# Altium PCB Register.PcbDoc
Units mil, origin at the board's own origin, x right, y up, seen from the top; angles counter-clockwise.
Board outline 5200 x 2700 mil, 2 copper layers (Top Layer, Bottom Layer); 55 components, 58 nets, 407 pads, 0 vias.
Unrouted connection lines stored in the file: 199.
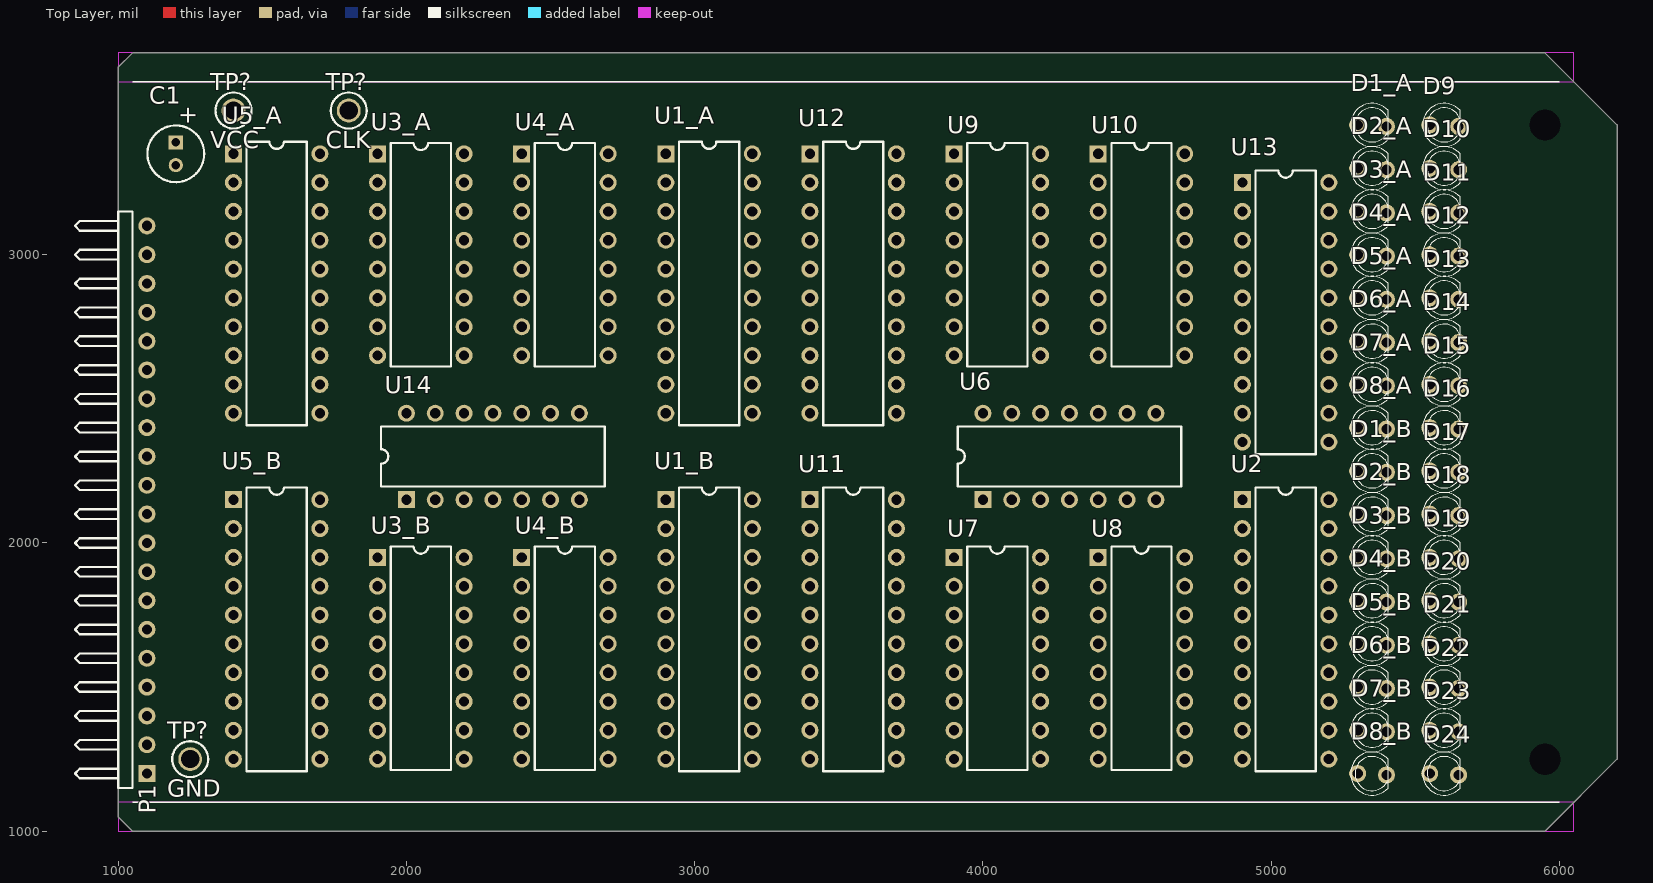
[diagram p0: Top Layer view]
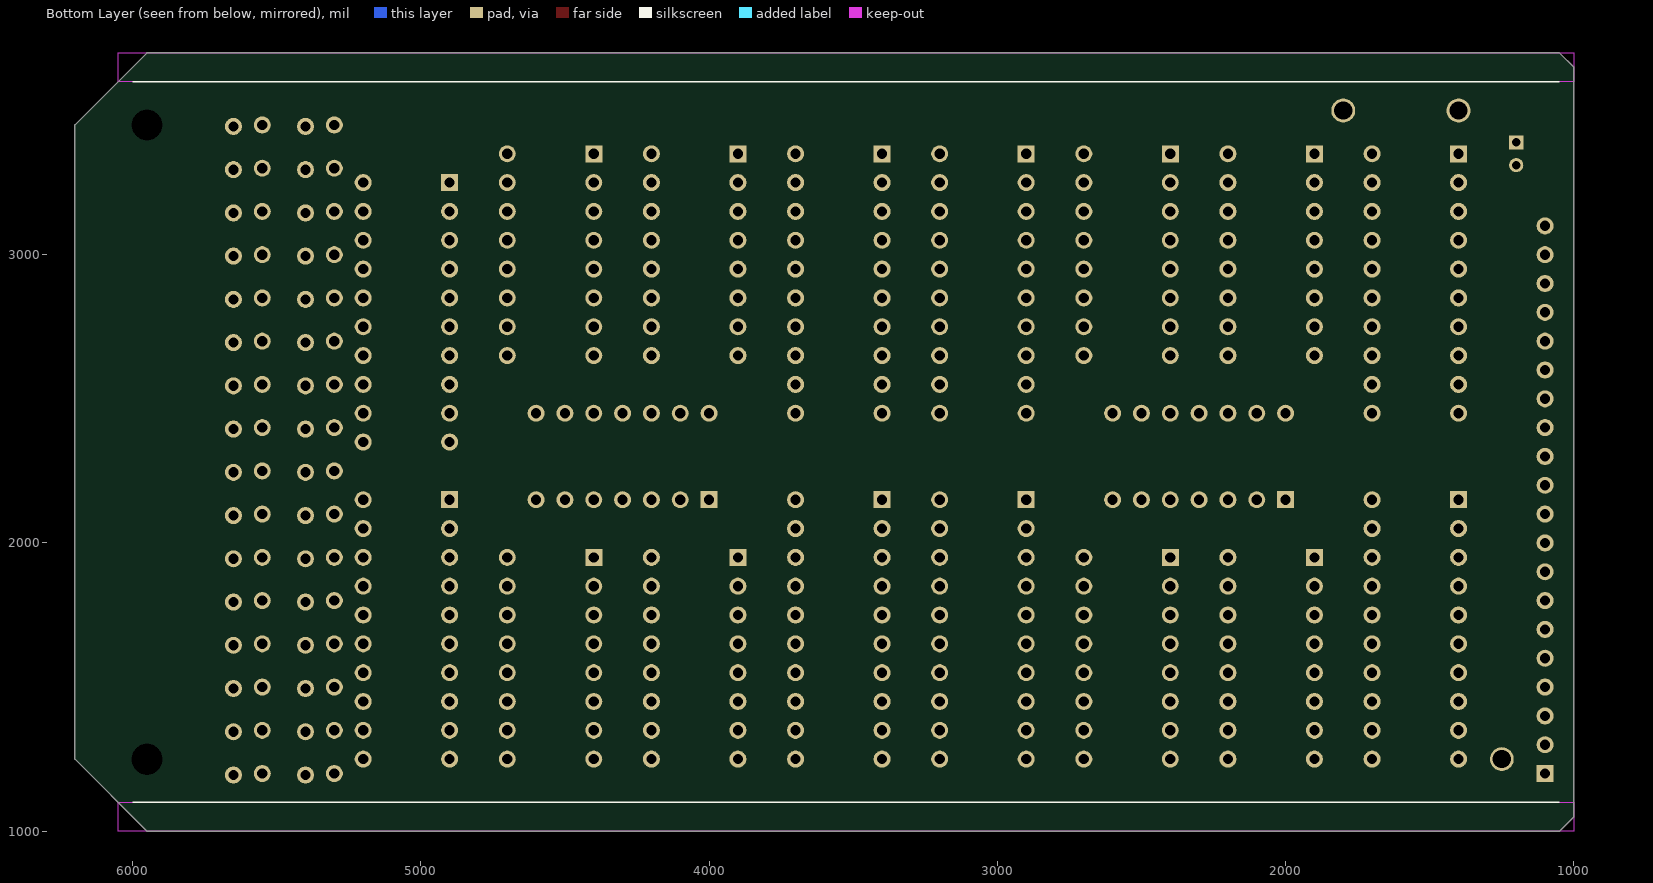
[diagram p1: Bottom Layer view, seen from below]

## Layer stack, top to bottom
Top Solder: solder mask 0.4, Solder Resist, Dk 3.5
Top Layer: signal copper 1.4
Dielectric 1: dielectric 12.6, FR-4, Dk 4.8
Bottom Layer: signal copper 1.4
Bottom Solder: solder mask 0.4, Solder Resist, Dk 3.5

## Board outline
1000,1050 1050,1000 5950,1000 6200,1250 6200,3450 5950,3700 1050,3700 1000,3650

## Design rules (kind name [scope] priority, off if disabled: settings)
Clearance [All] p1: gap=10 ignorepadtopadclearanceinfootprint=FALSE except(0: Arc-Hole Track-Hole SMDPad-Hole THPad-Hole Via-Hole Fill-Hole Poly-Hole Region-Hole Text-Hole)
PolygonConnect [All] p1: connectstyle=Relief reliefconductorwidth=10 reliefentries=4 polygonreliefangle="90 Angle" airgapwidth=10
RoutingVias [All] p1: holewidth=28 width=50 viastyle="Through Hole" minholewidth=28 minwidth=50 maxholewidth=28 maxwidth=50
SolderMaskExpansion [All] p1: expansion=4 istentingtop=FALSE
Width [All] p1: maxlimit=10 minlimit=10 preferedwidth=10
30 further rules are at their usual default settings.

## Classes and differential pairs
net class REG[0..15]: REG0 REG1 REG2 REG3 REG4 REG5 REG6 REG7 REG8 REG9 REG10 REG11 REG12 REG13 REG14 REG15
net class BUS[0..7]: BUS0 BUS1 BUS2 BUS3 BUS4 BUS5 BUS6 BUS7
channel class Register_8B: A B
component class HL: D9 D10 D11 D12 D13 D14 D15 D16 D17 D18 D19 D20 D21 D22 D23 D24 U2 U6 U7 U8 U9 U10 U11 U12 U13
component class B: D1_B D2_B D3_B D4_B D5_B D6_B D7_B D8_B U1_B U3_B U4_B U5_B
component class A: D1_A D2_A D3_A D4_A D5_A D6_A D7_A D8_A U1_A U3_A U4_A U5_A
component class Top: C1 P1 TP? U14

## Components (designator, comment, footprint, x,y, rotation, side; value= is the part's Value field where it differs from the comment)
C1 "Cap Pol5" C5x7 1200,3350 r270 top value=10uF
D1_A "LED Red" "LED 3mm RED" 5350,3450 r0 top (schematic designator D1)
D1_B "LED Red" "LED 3mm RED" 5350,2250 r0 top (schematic designator D1)
D2_A "LED Red" "LED 3mm RED" 5350,3300 r0 top (schematic designator D2)
D2_B "LED Red" "LED 3mm RED" 5350,2100 r0 top (schematic designator D2)
D3_A "LED Red" "LED 3mm RED" 5350,3150 r0 top (schematic designator D3)
D3_B "LED Red" "LED 3mm RED" 5350,1950 r0 top (schematic designator D3)
D4_A "LED Red" "LED 3mm RED" 5350,3000 r0 top (schematic designator D4)
D4_B "LED Red" "LED 3mm RED" 5350,1800 r0 top (schematic designator D4)
D5_A "LED Red" "LED 3mm RED" 5350,2850 r0 top (schematic designator D5)
D5_B "LED Red" "LED 3mm RED" 5350,1650 r0 top (schematic designator D5)
D6_A "LED Red" "LED 3mm RED" 5350,2700 r0 top (schematic designator D6)
D6_B "LED Red" "LED 3mm RED" 5350,1500 r0 top (schematic designator D6)
D7_A "LED Red" "LED 3mm RED" 5350,2550 r0 top (schematic designator D7)
D7_B "LED Red" "LED 3mm RED" 5350,1350 r0 top (schematic designator D7)
D8_A "LED Red" "LED 3mm RED" 5350,2400 r0 top (schematic designator D8)
D8_B "LED Red" "LED 3mm RED" 5350,1200 r0 top (schematic designator D8)
D9 "LED Red" "LED 3mm RED" 5600,3450 r0 top
D10 "LED Red" "LED 3mm RED" 5600,3300 r0 top
D11 "LED Red" "LED 3mm RED" 5600,3150 r0 top
D12 "LED Red" "LED 3mm RED" 5600,3000 r0 top
D13 "LED Red" "LED 3mm RED" 5600,2850 r0 top
D14 "LED Red" "LED 3mm RED" 5600,2700 r0 top
D15 "LED Red" "LED 3mm RED" 5600,2550 r0 top
D16 "LED Red" "LED 3mm RED" 5600,2400 r0 top
D17 "LED Red" "LED 3mm RED" 5600,2250 r0 top
D18 "LED Red" "LED 3mm RED" 5600,2100 r0 top
D19 "LED Red" "LED 3mm RED" 5600,1950 r0 top
D20 "LED Red" "LED 3mm RED" 5600,1800 r0 top
D21 "LED Red" "LED 3mm RED" 5600,1650 r0 top
D22 "LED Red" "LED 3mm RED" 5600,1500 r0 top
D23 "LED Red" "LED 3mm RED" 5600,1350 r0 top
D24 "LED Red" "LED 3mm RED" 5600,1200 r0 top
P1 "Header 20H" HDR1X20H 1100,1200 r90 top
TP? "CLK" KSTN-5011_V 1800,3500 r0 top
TP? "VCC" KSTN-5011_V 1400,3500 r0 top
TP? "GND" KSTN-5011_V 1250,1250 r0 top
U1_A "SN74LS245N" N020 3050,2900 r270 top (schematic designator U1)
U1_B "SN74LS245N" N020 3050,1700 r270 top (schematic designator U1)
U2 "SN74LS245N" N020 5050,1700 r270 top
U3_A "SN74LS173AN" N016D 2050,3000 r270 top (schematic designator U3)
U3_B "SN74LS173AN" N016D 2050,1600 r270 top (schematic designator U3)
U4_A "SN74LS173AN" N016D 2550,3000 r270 top (schematic designator U4)
U4_B "SN74LS173AN" N016D 2550,1600 r270 top (schematic designator U4)
U5_A "SN74LS245N" N020 1550,2900 r270 top (schematic designator U5)
U5_B "SN74LS245N" N020 1550,1700 r270 top (schematic designator U5)
U6 "SN74LS00N" N014 4300,2300 r0 top
U7 "SN74LS173AN" N016D 4050,1600 r270 top
U8 "SN74LS173AN" N016D 4550,1600 r270 top
U9 "SN74LS173AN" N016D 4050,3000 r270 top
U10 "SN74LS173AN" N016D 4550,3000 r270 top
U11 "SN74LS245N" N020 3550,1700 r270 top
U12 "SN74LS245N" N020 3550,2900 r270 top
U13 "SN74LS245N" N020 5050,2800 r270 top
U14 "SN74LS04N" N014 2300,2300 r0 top

## Footprints (in the part's own frame and the unit in brackets; to place one, negate y for a bottom-side part, rotate by r counter-clockwise, add the part's x,y. Pads: shape width x height; smd on the part's side, far side on the other; paste and mask are expansions set on the pad)
C5x7 [mm] "Capacitor; 2 Leads"
  rect 1.25x1.25 hole 0.75: 1(-1,0)
  round 1.25 hole 0.75: 2(1,0)
  silkscreen extent -2.5,-2.5 2.5,2.5, body extent -2.5,-2.5 2.5,2.5, height 7
HDR1X20H [mm] "Connector; Header; 20 Position; Right Angle"
  rect 1.5x1.5 hole 0.9: 1(0,0)
  round 1.5 hole 0.9: 2(2.54,0) 3(5.08,0) 4(7.62,0) 5(10.16,0) 6(12.7,0) 7(15.24,0) 8(17.78,0) 9(20.32,0) 10(22.86,0) 11(25.4,0) 12(27.94,0) 13(30.48,0) 14(33.02,0) 15(35.56,0) 16(38.1,0) 17(40.64,0) 18(43.18,0) 19(45.72,0) 20(48.26,0)
  silkscreen extent -1.27,1.27 49.53,6.35
KSTN-5011_V [mm] "Test Point, Dia 3.17mm"
  round 2.1 hole 1.6: 1(0,0)
  silkscreen extent -1.59,-1.58 1.59,1.58, body extent -1.59,-1.59 1.59,1.59, height 8.13
"LED 3mm RED" [mm]
  round 1.5 hole 0.9: 1(-1.27,0) 2(1.27,-0.127)
  silkscreen extent -1.9,-1.9 1.41,1.9, body extent -1.92,-1.92 1.65,1.92, height 5.3
N014 [mm] "DIP; 14 Leads; Row Spacing 7.62 mm; Pitch 2.54 mm"
  rect 1.5x1.5 hole 0.9: 1(-7.62,-3.81)
  round 1.5 hole 0.9: 2(-5.08,-3.81) 3(-2.54,-3.81) 4(0,-3.81) 5(2.54,-3.81) 6(5.08,-3.81) 7(7.62,-3.81) 8(7.62,3.81) 9(5.08,3.81) 10(2.54,3.81) 11(0,3.81) 12(-2.54,3.81) 13(-5.08,3.81) 14(-7.62,3.81)
  silkscreen extent -9.85,-2.65 9.85,2.65, body extent -9.15,-5.08 9.15,5.12, height 7.88
N016D [mm] "DIP; 16 Leads; Row Spacing 7.62 mm; Pitch 2.54 mm"
  rect 1.5x1.5 hole 0.9: 1(-8.89,-3.81)
  round 1.5 hole 0.9: 2(-6.35,-3.81) 3(-3.81,-3.81) 4(-1.27,-3.81) 5(1.27,-3.81) 6(3.81,-3.81) 7(6.35,-3.81) 8(8.89,-3.81) 9(8.89,3.81) 10(6.35,3.81) 11(3.81,3.81) 12(1.27,3.81) 13(-1.27,3.81) 14(-3.81,3.81) 15(-6.35,3.81) 16(-8.89,3.81)
  silkscreen extent -9.85,-2.65 9.85,2.65
N020 [mm] "DIP; 20 Leads; Row Spacing 7.62 mm; Pitch 2.54 mm"
  rect 1.5x1.5 hole 0.9: 1(-11.43,-3.81)
  round 1.5 hole 0.9: 2(-8.89,-3.81) 3(-6.35,-3.81) 4(-3.81,-3.81) 5(-1.27,-3.81) 6(1.27,-3.81) 7(3.81,-3.81) 8(6.35,-3.81) 9(8.89,-3.81) 10(11.43,-3.81) 11(11.43,3.81) 12(8.89,3.81) 13(6.35,3.81) 14(3.81,3.81) 15(1.27,3.81) 16(-1.27,3.81) 17(-3.81,3.81) 18(-6.35,3.81) 19(-8.89,3.81) 20(-11.43,3.81)
  silkscreen extent -12.5,-2.65 12.5,2.65, body extent -13.08,-5.08 13.08,5.12, height 7.88

## Part data
C1: "Polarized Capacitor", LatestRevisionDate=17-Jul-2002, LatestRevisionNote="Re-released for DXP Platform.", PackageDescription="Polarized Capacitor; 2 Leads", PackageReference=POLAR0.8, Published=8-Jun-2000, Publisher="Altium Limited"
D1_A D1_B D2_A D2_B D3_A D3_B D4_A D4_B D5_A D5_B D6_A D6_B D7_A D7_B D8_A D8_B D9 D10 D11 D12 D13 D14 D15 D16 D17 D18 D19 D20 D21 D22 D23 D24: library part LED_Red
P1: "Header, 20-Pin, Right Angle", LatestRevisionDate=17-Jul-2002, LatestRevisionNote="Re-released for DXP Platform.", Publisher="Altium Limited", System=Connector
TP? TP? TP?: library part TP
U1_A U1_B U2 U5_A U5_B U11 U12 U13: "Octal Bus Transceiver with 3-State Outputs", ComponentLink1Description="Manufacturer Link", ComponentLink1URL=http://www.ti.com/, ComponentLink2Description=Datasheet, ComponentLink2URL=http://www-s.ti.com/sc/ds/sn74ls245.pdf, DatasheetVersion=Mar-1988, LatestRevisionDate=04-Mar-2005, LatestRevisionNote="Stylized 3D Model Added.", PackageDescription="DIP; 20 Leads; Row Spacing 7.62 mm; Pitch 2.54 mm", PackageReference=N020, PackageVersion=Oct-1995, Published=8-Jun-2000, Publisher="Altium Limited"
U3_A U3_B U4_A U4_B U7 U8 U9 U10: "4-Bit D-Type Register with 3-State Outputs", Code_JEDEC=MS-001-BB, ComponentLink1Description="Manufacturer Link", ComponentLink1URL=http://www.ti.com/, ComponentLink2Description=Datasheet, ComponentLink2URL=http://www-s.ti.com/sc/ds/sn74ls173a.pdf, DatasheetVersion=Mar-1988, LatestRevisionDate=04-Mar-2005, LatestRevisionNote="Stylized 3D Model Added.", PackageDescription="DIP; 16 Leads; Row Spacing 7.62 mm; Pitch 2.54 mm", PackageReference=N016D, PackageVersion=Oct-1995, Published=8-Jun-2000, Publisher="Altium Limited"
U6: "Quadruple 2-Input Positive-NAND Gate", ComponentLink1Description="Manufacturer Link", ComponentLink1URL=http://www.ti.com/, ComponentLink2Description=Datasheet, ComponentLink2URL=http://www-s.ti.com/sc/ds/sn74ls00.pdf, DatasheetVersion=Mar-1988, LatestRevisionDate=04-Mar-2005, LatestRevisionNote="Stylized 3D Model Added.", PackageDescription="DIP; 14 Leads; Row Spacing 7.62 mm; Pitch 2.54 mm", PackageReference=N014, PackageVersion=Oct-1995, Published=8-Jun-2000, Publisher="Altium Limited"
U14: "Hex Inverter", ComponentLink1Description="Manufacturer Link", ComponentLink1URL=http://www.ti.com/, ComponentLink2Description=Datasheet, ComponentLink2URL=http://www-s.ti.com/sc/ds/sn74ls04.pdf, DatasheetVersion=Mar-1988, LatestRevisionDate=04-Mar-2005, LatestRevisionNote="Stylized 3D Model Added.", PackageDescription="DIP; 14 Leads; Row Spacing 7.62 mm; Pitch 2.54 mm", PackageReference=N014, PackageVersion=Oct-1995, Published=8-Jun-2000, Publisher="Altium Limited"

## Free pads (board coordinates)
  round 0 hole 109: ""(5950,1250) ""(5950,3450)

## Nets (pads, with @x,y where several pads share a name; then routed paths per layer and width w, separated by ;. In a path a pad name is that pad's centre, name@x,y a point inside that pad or via, vN(x,y) a via of type N, cw(c..) or ccw(c..) an arc to the next point about the centre after c; other vN are vias at no path point)
AI#: P1.14 U3_A.9 U3_A.10 U4_A.9 U4_A.10
AO#: P1.17 U5_A.19
BI#: P1.15 U3_B.9 U3_B.10 U4_B.9 U4_B.10
BO#: P1.18 U5_B.19
BUS0: P1.13 U3_A.14 U3_B.14 U5_A.18 U5_B.18 U7.14 U9.14 U11.18 U12.18
BUS1: P1.12 U3_A.13 U3_B.13 U5_A.17 U5_B.17 U7.13 U9.13 U11.17 U12.17
BUS2: P1.11 U3_A.12 U3_B.12 U5_A.16 U5_B.16 U7.12 U9.12 U11.16 U12.16
BUS3: P1.10 U3_A.11 U3_B.11 U5_A.15 U5_B.15 U7.11 U9.11 U11.15 U12.15
BUS4: P1.9 U4_A.14 U4_B.14 U5_A.14 U5_B.14 U8.14 U10.14 U11.14 U12.14
BUS5: P1.8 U4_A.13 U4_B.13 U5_A.13 U5_B.13 U8.13 U10.13 U11.13 U12.13
BUS6: P1.7 U4_A.12 U4_B.12 U5_A.12 U5_B.12 U8.12 U10.12 U11.12 U12.12
BUS7: P1.6 U4_A.11 U4_B.11 U5_A.11 U5_B.11 U8.11 U10.11 U11.11 U12.11
CLK: P1.3 TP?.1@1800,3500 U3_A.7 U3_B.7 U4_A.7 U4_B.7 U7.7 U8.7 U9.7 U10.7
GND: C1.2 P1.2 TP?.1@1250,1250 U3_A.1 U3_A.2 U3_A.8 U3_B.1 U3_B.2 U3_B.8 U4_A.1 U4_A.2 U4_A.8 U4_B.1 U4_B.2 U4_B.8 U5_A.10 U5_B.10 U6.7 U7.1 U7.2 U7.8 U8.1 U8.2 U8.8 U9.1 U9.2 U9.8 U10.1 U10.2 U10.8 U11.10 U12.10 U14.7 U14.9 U14.11 U14.13
HI: U6.1 U6.4 U14.6
HI#: P1.16 U14.5
HO#: P1.19 U6.10 U6.13
LM: U6.5 U6.9 U14.4
LM#: P1.5 U6.2 U6.12 U14.3
LOAD_LSB#: U6.3 U7.9 U7.10 U8.9 U8.10
LOAD_MSB#: U6.6 U9.9 U9.10 U10.9 U10.10
OUT_LSB#: U6.11 U11.19
OUT_MSB#: U6.8 U12.19
REG0: U7.3 U11.2
REG0_A: U3_A.3 U5_A.2
REG0_B: U3_B.3 U5_B.2
REG1: U7.4 U11.3
REG1_A: U3_A.4 U5_A.3
REG1_B: U3_B.4 U5_B.3
REG2: U7.5 U11.4
REG2_A: U3_A.5 U5_A.4
REG2_B: U3_B.5 U5_B.4
REG3: U7.6 U11.5
REG3_A: U3_A.6 U5_A.5
REG3_B: U3_B.6 U5_B.5
REG4: U8.3 U11.6
REG4_A: U4_A.3 U5_A.6
REG4_B: U4_B.3 U5_B.6
REG5: U8.4 U11.7
REG5_A: U4_A.4 U5_A.7
REG5_B: U4_B.4 U5_B.7
REG6: U8.5 U11.8
REG6_A: U4_A.5 U5_A.8
REG6_B: U4_B.5 U5_B.8
REG7: U8.6 U11.9
REG7_A: U4_A.6 U5_A.9
REG7_B: U4_B.6 U5_B.9
REG8: U9.3 U12.2
REG9: U9.4 U12.3
REG10: U9.5 U12.4
REG11: U9.6 U12.5
REG12: U10.3 U12.6
REG13: U10.4 U12.7
REG14: U10.5 U12.8
REG15: U10.6 U12.9
RST: U3_A.15 U3_B.15 U4_A.15 U4_B.15 U7.15 U8.15 U9.15 U10.15 U14.2
RST#: P1.4 U14.1
VCC: C1.1 P1.1 TP?.1@1400,3500 U3_A.16 U3_B.16 U4_A.16 U4_B.16 U5_A.1 U5_A.20 U5_B.1 U5_B.20 U6.14 U7.16 U8.16 U9.16 U10.16 U11.1 U11.20 U12.1 U12.20 U14.14
pads on no net: D1_A.1 D1_A.2 D1_B.1 D1_B.2 D2_A.1 D2_A.2 D2_B.1 D2_B.2 D3_A.1 D3_A.2 D3_B.1 D3_B.2 D4_A.1 D4_A.2 D4_B.1 D4_B.2 D5_A.1 D5_A.2 D5_B.1 D5_B.2 D6_A.1 D6_A.2 D6_B.1 D6_B.2 D7_A.1 D7_A.2 D7_B.1 D7_B.2 D8_A.1 D8_A.2 D8_B.1 D8_B.2 D9.1 D9.2 D10.1 D10.2 D11.1 D11.2 D12.1 D12.2 D13.1 D13.2 D14.1 D14.2 D15.1 D15.2 D16.1 D16.2 D17.1 D17.2 D18.1 D18.2 D19.1 D19.2 D20.1 D20.2 D21.1 D21.2 D22.1 D22.2 D23.1 D23.2 D24.1 D24.2 P1.20 U1_A.1 U1_A.2 U1_A.3 U1_A.4 U1_A.5 U1_A.6 U1_A.7 U1_A.8 U1_A.9 U1_A.10 U1_A.11 U1_A.12 U1_A.13 U1_A.14 U1_A.15 U1_A.16 U1_A.17 U1_A.18 U1_A.19 U1_A.20 U1_B.1 U1_B.2 U1_B.3 U1_B.4 U1_B.5 U1_B.6 U1_B.7 U1_B.8 U1_B.9 U1_B.10 U1_B.11 U1_B.12 U1_B.13 U1_B.14 U1_B.15 U1_B.16 U1_B.17 U1_B.18 U1_B.19 U1_B.20 U2.1 U2.2 U2.3 U2.4 U2.5 U2.6 U2.7 U2.8 U2.9 U2.10 U2.11 U2.12 U2.13 U2.14 U2.15 U2.16 U2.17 U2.18 U2.19 U2.20 U13.1 U13.2 U13.3 U13.4 U13.5 U13.6 U13.7 U13.8 U13.9 U13.10 U13.11 U13.12 U13.13 U13.14 U13.15 U13.16 U13.17 U13.18 U13.19 U13.20 U14.8 U14.10 U14.12

## Keep-outs
Top Layer:
  rectangle: 1000,3600 6050,3700
  rectangle: 1000,1000 6050,1100
Bottom Layer:
  rectangle: 1000,1000 6050,1100
  rectangle: 1000,3600 6050,3700

## Silkscreen, mask and mechanical layers (free items; w line width, h text height)
Top Overlay:
  lines w5: 1050,1100 6000,1100 ; 1050,3600 6000,3600
Bottom Overlay:
  lines w5: 1050,1100 6000,1100 ; 1050,3600 6000,3600

## Text inside footprints (layer, text, board x,y; h text height)
C1: Top Overlay "+" at 1268.89,3448.43 h59.06 r90